# Altium PCB PCB_actionneur2.PcbDoc
Units mil, origin at the board's own origin, x right, y up, seen from the top; angles counter-clockwise.
Board outline 4375 x 2300 mil, 4 copper layers (Top Layer, Internal Plane 1, Internal Plane 2, Bottom Layer); 31 components, 26 nets, 191 pads, 1 vias.
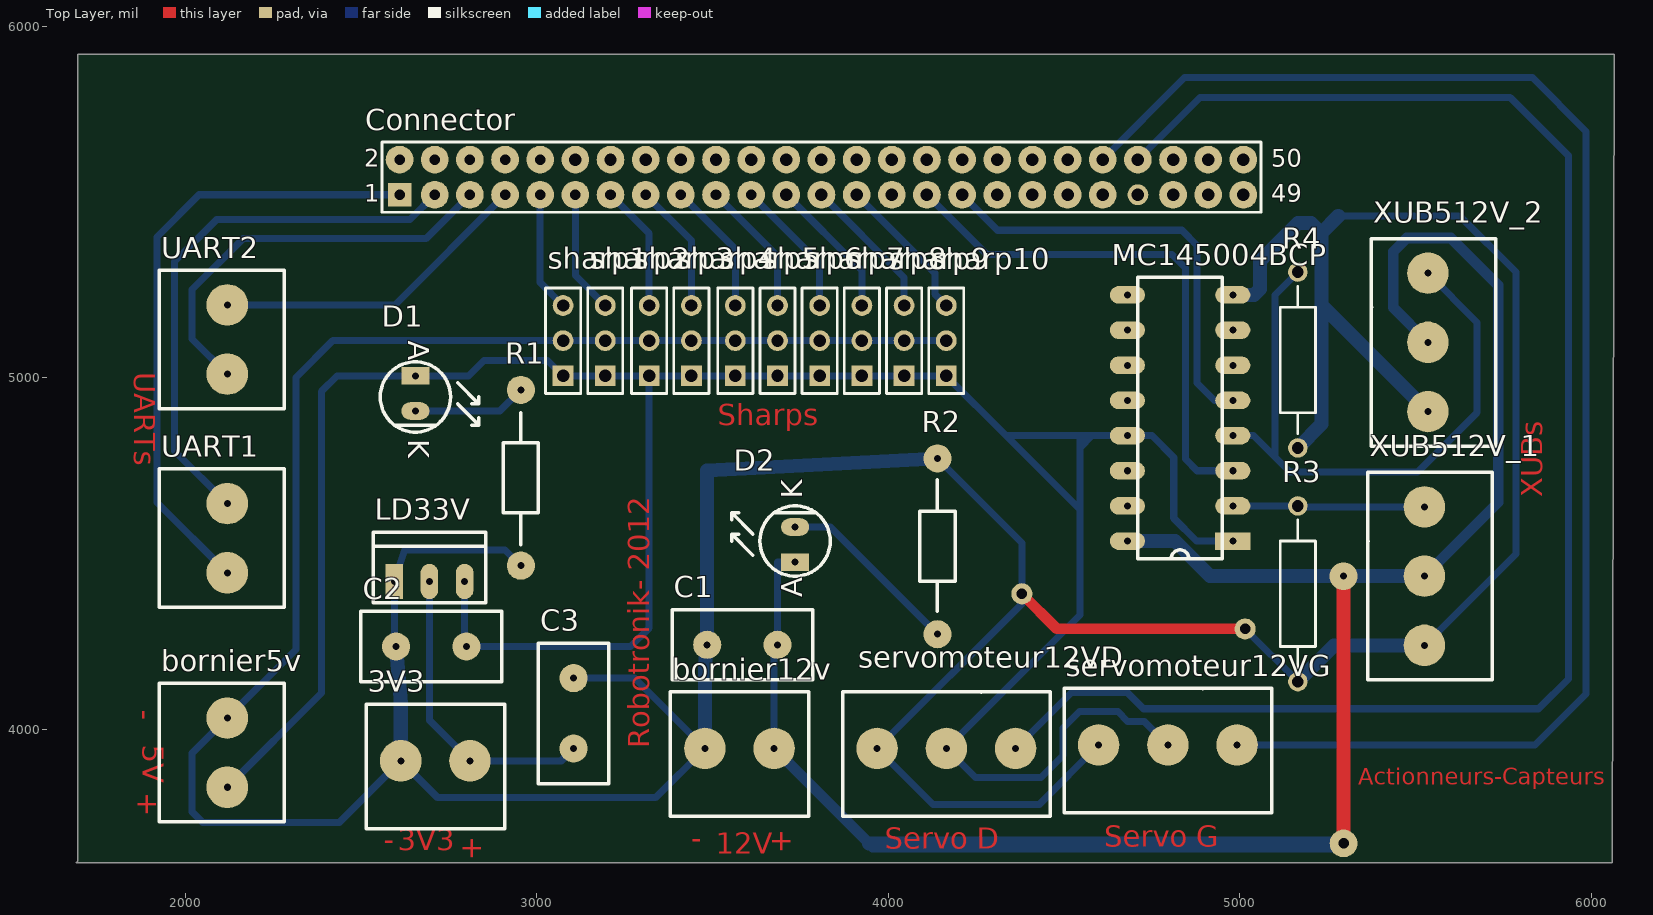
[diagram p0: Top Layer view]
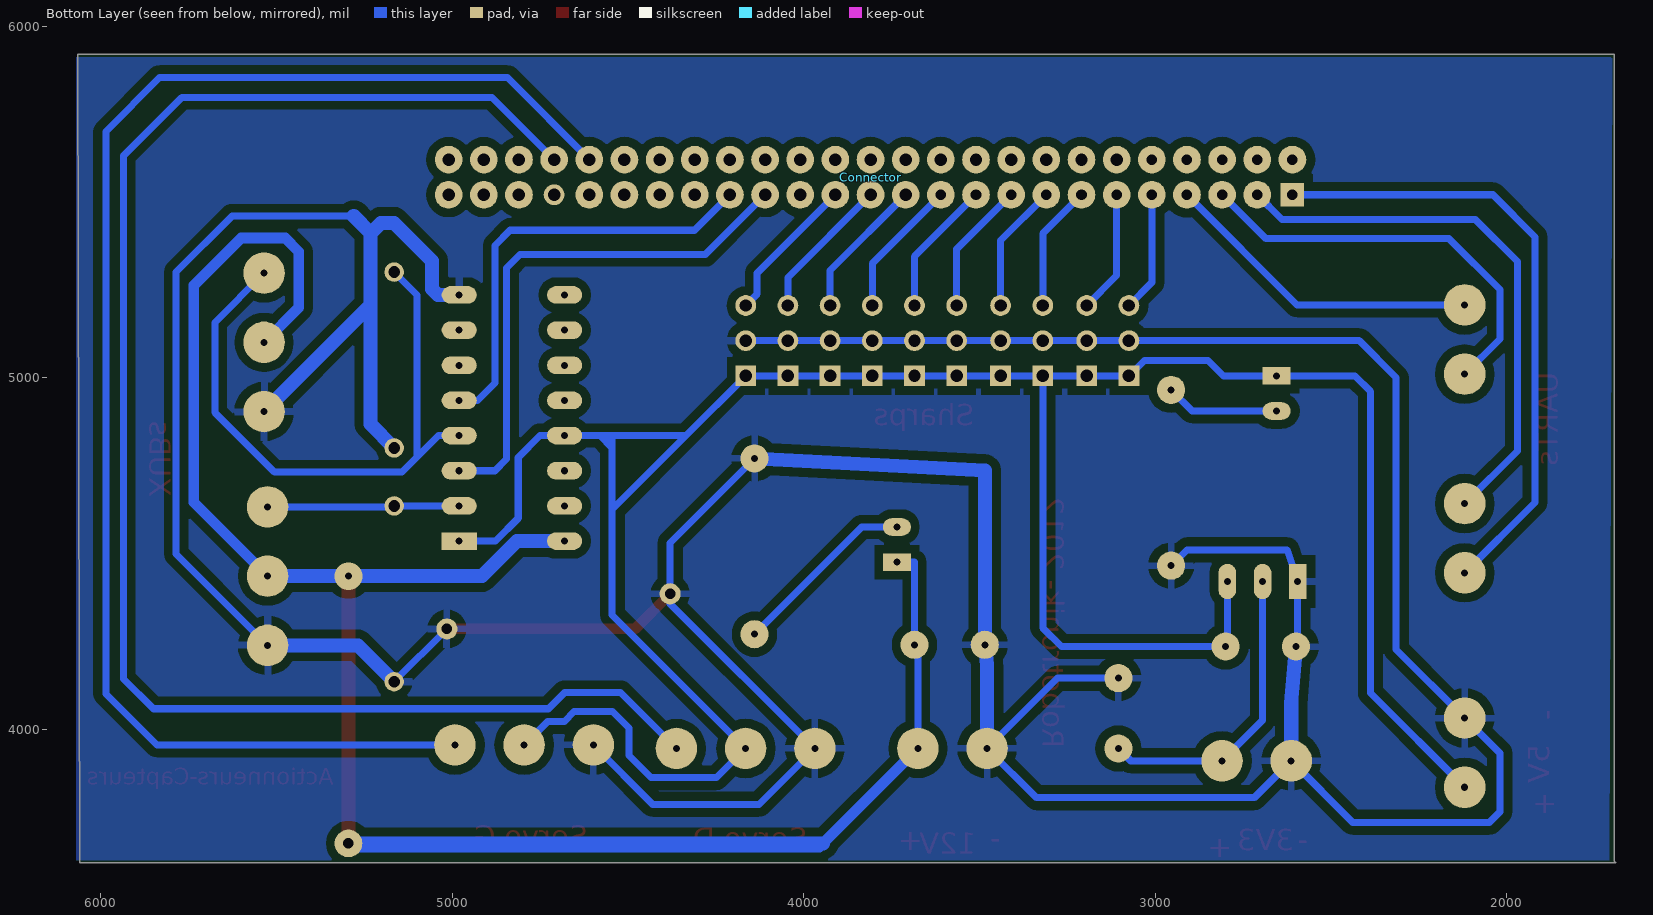
[diagram p1: Bottom Layer view, seen from below]
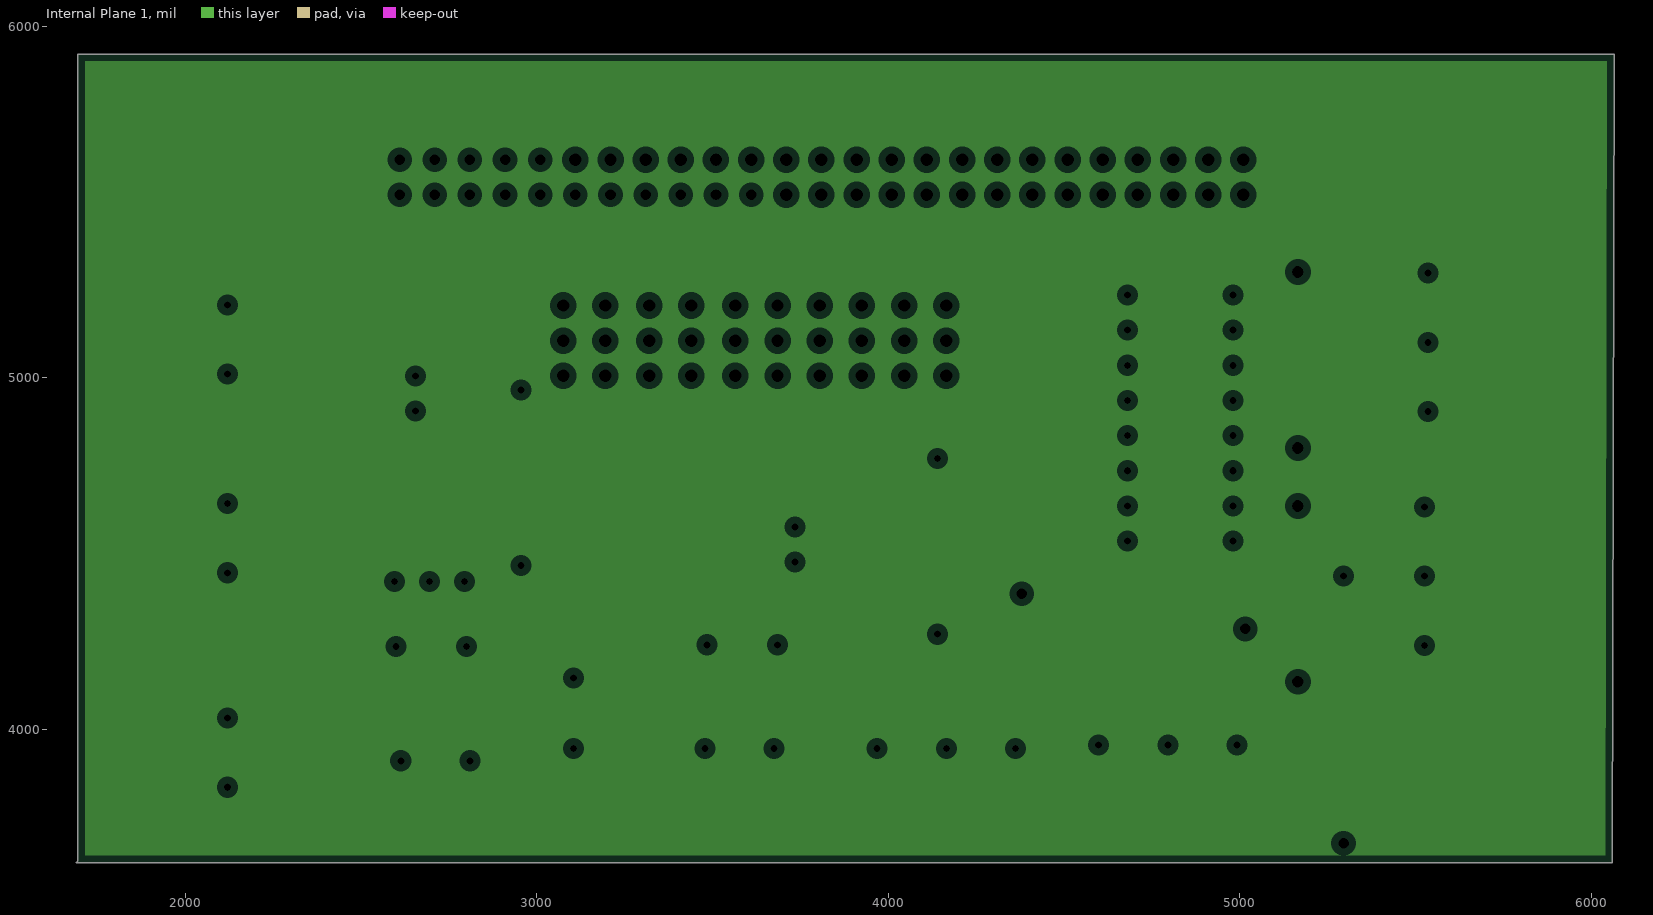
[diagram p2: Internal Plane 1, clearances drawn from the general rule]
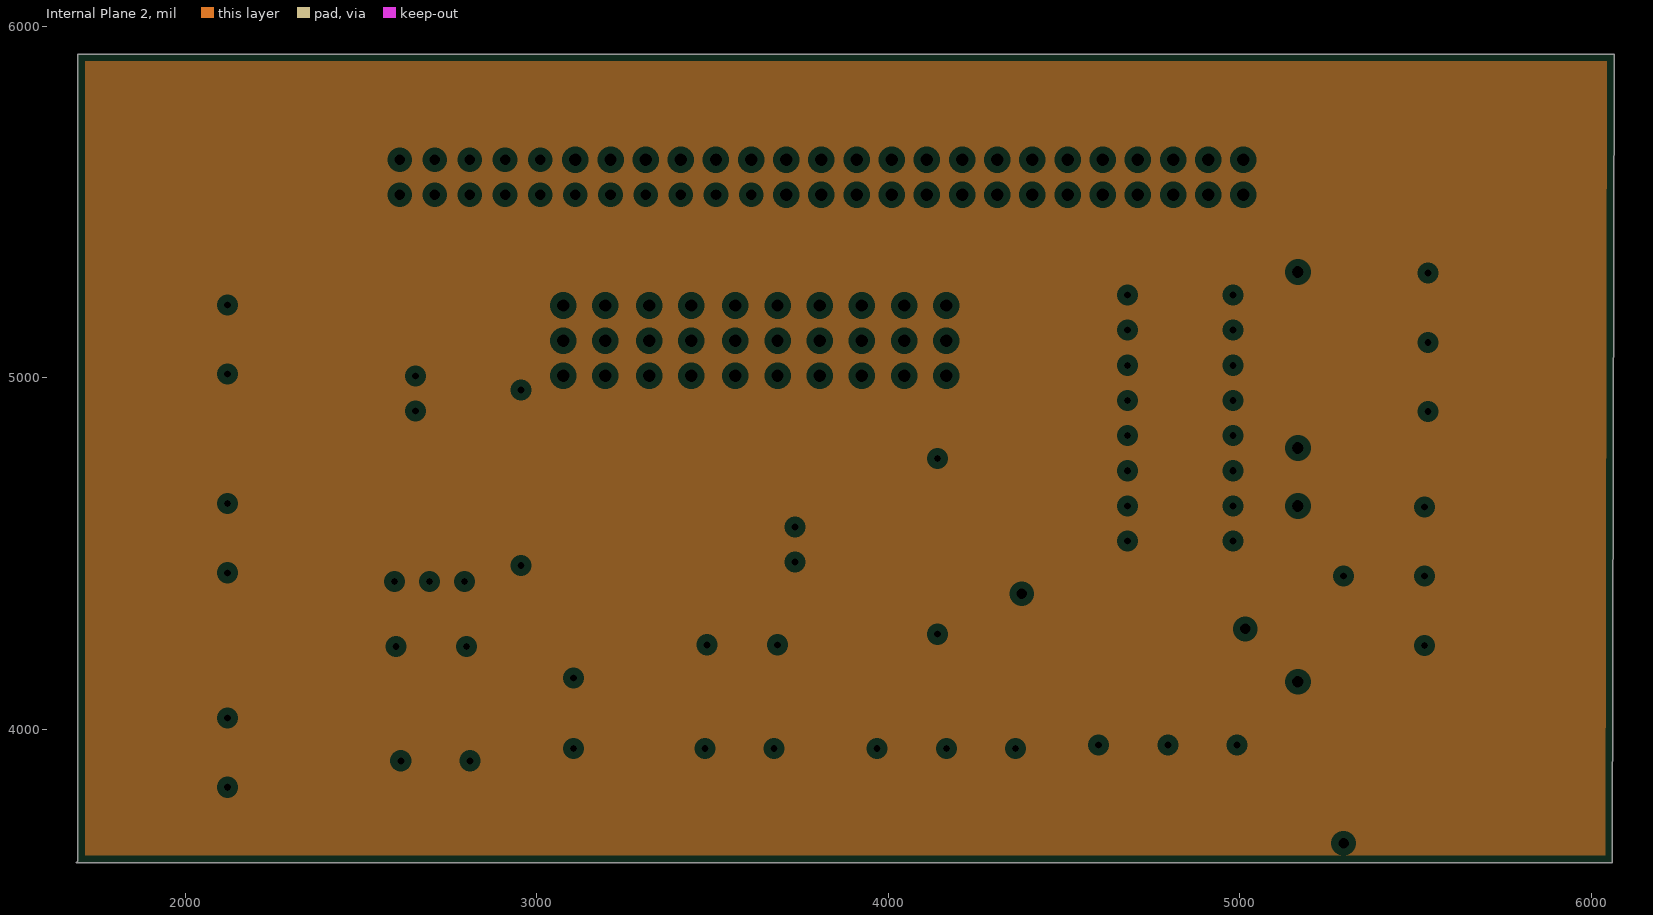
[diagram p3: Internal Plane 2, clearances drawn from the general rule]

## Layer stack, top to bottom
Top Layer: signal copper 1.4
Dielectric: dielectric 12.6, FR-4, Dk 4.8
Internal Plane 1: plane copper 1.4
Dielectric: dielectric 12.6, FR-4, Dk 4.8
Internal Plane 2: plane copper 1.4
Dielectric: dielectric 12.6, FR-4, Dk 4.8
Bottom Layer: signal copper 1.4

## Board outline
6065,5920 1695,5920 1695,3625 1690,3620 6060,3620

## Design rules (kind name [scope] priority, off if disabled: settings)
Clearance [All] p1: gap=13
FabricationTestPointUsage TestPointUsage [All] p1: valid=0 allowmultiple=FALSE
FabricationTestpoint Testpoint [All] p1: side=3 testpointundercomponent=TRUE minsize=40 maxsize=100 preferedsize=60 minholesize=0 maxholesize=40 preferedholesize=32 testpointgrid=1 allowsidetop=TRUE allowsidebottom=TRUE usegrid=TRUE gridtolerance=0.01
PlaneClearance [All] p1: clearance=20
PlaneConnect [All] p1: planeconnectstyle=Relief reliefexpansion=20 reliefentries=4 reliefconductorwidth=10 reliefairgap=10
PolygonConnect [All] p1: connectstyle=Relief reliefconductorwidth=20 reliefentries=4 polygonreliefangle="90 Angle"
RoutingLayers RoutingLayers_1 [All] p1: top layer_v5=FALSE bottom layer_v5=TRUE
RoutingVias [All] p1: holewidth=20 width=78.74 viastyle="Through Hole" minholewidth=20 minwidth=78.74 maxholewidth=20 maxwidth=78.74
SilkscreenOverComponentPads [All] p1: minsilkscreentomaskgap=10
SolderMaskExpansion [All] p1: expansion=4
Width Width_1 [NOT InNetClass('power_net')] p1: maxlimit=20 minlimit=20 preferedwidth=20
Width Width_power [InNetClass('power_net')] p2: maxlimit=50 minlimit=20 preferedwidth=40
22 further rules are at their usual default settings.

## Classes and differential pairs
net class power_net: GND V12
net class com_net: NetConnector_2 NetConnector_4 NetConnector_5 NetConnector_6 NetConnector_8 NetConnector_10 NetConnector_12 NetConnector_14 NetConnector_16 NetConnector_18 NetConnector_20 NetConnector_22 NetConnector_24 NetConnector_26 NetConnector_27 NetConnector_28 NetConnector_29 NetConnector_30 NetConnector_31 NetConnector_32 NetConnector_33 NetConnector_34 NetConnector_35 NetConnector_36 NetConnector_37 NetConnector_38 NetConnector_39 NetConnector_40 NetConnector_42 NetConnector_44 NetConnector_46 NetConnector_48 NetConnector_49 NetConnector_50 RX1 RX2 SERVOD SERVOG SHARP1 SHARP2 SHARP3 SHARP4 SHARP5 SHARP6 SHARP7 SHARP8 SHARP9 SHARP10 TX1 TX2 XUBCMOS_1 XUBCMOS_2

## Components (designator, comment, footprint, x,y, rotation, side; value= is the part's Value field where it differs from the comment)
3V3 "Bornier_2" Bornier_2 2515,3910 r0 top
bornier5v "Bornier_2" Bornier_2 2120,4130 r270 top
bornier12v "Bornier_2" Bornier_2 3380,3945 r0 top
C1 "Cap2" CAPA2 3485,4240 r0 top
C2 "Cap Semi" CAPA2 2600,4235 r0 top
C3 "Cap Semi" CAPA2 3105,4145 r270 top
Connector "Header 25X2" HDR2X25 2610,5520 r0 top
D1 "Led" LED 2655,5005 r270 top
D2 "Led" LED 3735,4475 r90 top
LD33V "LM317T" TO220 2595,4420 r0 top
MC145004BCP "CD4017BCN" DIP16 4980,4535 r180 top
R1 "Res2" res5_1/4W 2955,4465 r90 top
R2 "Res2" res5_1/4W 4140,4770 r270 top
R3 "Res Semi" AXIAL-0.5 5165,4385 r90 top
R4 "Res Semi" AXIAL-0.5 5165,5050 r90 top
servomoteur12VD "Bornier_3" Bornier_3 3870,3945 r0 top
servomoteur12VG "Bornier_3" Bornier_3 4500,3955 r0 top
sharp1 "Bornier_3" HDR1X3 3075,5005 r90 top
sharp2 "Bornier_3" HDR1X3 3195,5005 r90 top
sharp3 "Bornier_3" HDR1X3 3320,5005 r90 top
sharp4 "Bornier_3" HDR1X3 3440,5005 r90 top
sharp5 "Bornier_3" HDR1X3 3565,5005 r90 top
sharp6 "Bornier_3" HDR1X3 3685,5005 r90 top
sharp7 "Bornier_3" HDR1X3 3805,5005 r90 top
sharp8 "Bornier_3" HDR1X3 3925,5005 r90 top
sharp9 "Bornier_3" HDR1X3 4045,5005 r90 top
sharp10 "Bornier_3" HDR1X3 4165,5005 r90 top
UART1 "Bornier_2" Bornier_2 2120,4740 r270 top
UART2 "Bornier_2" Bornier_2 2120,5305 r270 top
XUB512V_1 "Bornier_3" Bornier_3 5525,4140 r90 top
XUB512V_2 "Bornier_3" Bornier_3 5535,4805 r90 top

## Footprints (in the part's own frame and the unit in brackets; to place one, negate y for a bottom-side part, rotate by r counter-clockwise, add the part's x,y. Pads: shape width x height; smd on the part's side, far side on the other; paste and mask are expansions set on the pad)
AXIAL-0.5 [mm] "Axial Device, Thru-Hole; 2 Leads; 0.5 in Pin Spacing"
  round 1.4 hole 0.85: 1(-6.35,0) 2(6.35,0)
  silkscreen extent -5.33,-1.27 5.33,1.27
Bornier_2 [mm]
  round 3 hole 0.508: 1(2.5,0) 2(7.5,0)
  silkscreen extent 0,-4.9 10,4.1
Bornier_3 [mm]
  round 3 hole 0.508: 1(2.5,0) 2(7.5,0) 3(12.5,0)
  silkscreen extent 0,-4.9 15,4.1
CAPA2 [mil]
  round 80 hole 20: 1(0,0) 2(200,0)
  silkscreen extent -100,-100 300,100
DIP16 [mil]
  rect 100x50 hole 20: 1(0,0)
  oval 100x50 hole 20: 2(0,-100) 3(0,-200) 4(0,-300) 5(0,-400) 6(0,-500) 7(0,-600) 8(0,-700) 9(300,-700) 10(300,-600) 11(300,-500) 12(300,-400) 13(300,-300) 14(300,-200) 15(300,-100) 16(300,0)
  silkscreen extent 30,-750 270,50
HDR1X3 [mm] "Connector; Header; 3 Position"
  rect 1.5x1.5 hole 0.9: 1(0,0)
  round 1.5 hole 0.9: 2(2.54,0) 3(5.08,0)
  silkscreen extent -1.27,-1.27 6.35,1.27
HDR2X25 [mm] "Connector; Header; 25x2 Position"
  rect 1.5x1.5 smd far side: 1(0,0)
  round 1.5 smd far side: 2(0,2.54) 3(2.54,0) 4(2.54,2.54) 5(5.08,0) 6(5.08,2.54) 7(7.62,0) 8(7.62,2.54) 9(10.16,0) 10(10.16,2.54) 11(12.7,0) 13(15.24,0) 15(17.78,0) 17(20.32,0) 19(22.86,0) 21(25.4,0)
  round 1.5 hole 0.9: 12(12.7,2.54) 14(15.24,2.54) 16(17.78,2.54) 18(20.32,2.54) 20(22.86,2.54) 22(25.4,2.54) 23(27.94,0) 24(27.94,2.54) 25(30.48,0) 26(30.48,2.54) 27(33.02,0) 28(33.02,2.54) 29(35.56,0) 30(35.56,2.54) 31(38.1,0) 32(38.1,2.54) 33(40.64,0) 34(40.64,2.54) 35(43.18,0) 36(43.18,2.54) 37(45.72,0) 38(45.72,2.54) 39(48.26,0) 40(48.26,2.54) 41(50.8,0) 42(50.8,2.54) 43(53.34,0) 44(53.34,2.54) 45(55.88,0) 46(55.88,2.54) 47(58.42,0) 48(58.42,2.54) 49(60.96,0) 50(60.96,2.54)
  silkscreen extent -1.27,-1.27 62.23,3.81
LED [mil]
  rect 50x80 hole 20: 1(0,0)
  oval 50x80 hole 20: 2(100,0)
  silkscreen extent -40,-100 160,180
res5_1/4W [mil]
  round 80 hole 20: 1(0,0) 2(500,0)
  silkscreen extent 60,-50 435,50
TO220 [mil]
  rect 50x100 hole 20: 1(0,0)
  oval 50x100 hole 20: 2(100,0) 3(200,0)
  silkscreen extent -60,-60 260,140

## Part data
3V3 bornier5v bornier12v UART1 UART2: "Header, 2-Pin"
C1: "Capacitor"
C2 C3: "Capacitor (Semiconductor SIM Model)"
Connector: "Header, 25-Pin, Dual row"
D1 D2: "LED"
LD33V: "3-Terminal Adjustable Regulator"
MC145004BCP: "Decade Counter/Divider with 10 Decoded Outputs"
R1 R2: "Resistor"
R3 R4: "Semiconductor Resistor"
servomoteur12VD servomoteur12VG sharp1 sharp2 sharp3 sharp4 sharp5 sharp6 sharp7 sharp8 sharp9 sharp10 XUB512V_1 XUB512V_2: "Header, 3-Pin"

## Free pads (board coordinates)
  rect 66.93x66.93 hole 30: 0(2610,5520)
  round 78.74 hole 30: 0(2610,5620) 0(2710,5520) 0(2710,5620) 0(2810,5520) 0(2810,5620) 0(2910,5520) 0(2910,5620) 0(3010,5520) 0(3010,5620) 0(3110,5520) 0(3110,5620) 0(3210,5520) 0(3210,5620) 0(3310,5520) 0(3310,5620) 0(3410,5520) 0(3410,5620) 0(3510,5520) 0(3510,5620) 0(3610,5520) 0(3610,5620) 0(3710,5520) 0(3710,5620) 0(3810,5520) 0(3810,5620) 0(3910,5520) 0(3910,5620) 0(4010,5520) 0(4010,5620) 0(4110,5520) 0(4110,5620) 0(4210,5520) 0(4210,5620) 0(4310,5520) 0(4310,5620) 0(4410,5520) 0(4410,5620) 0(4510,5520) 0(4510,5620) 0(4610,5520) 0(4610,5620) 0(4710,5620) 0(4810,5520) 0(4810,5620) 0(4910,5520) 0(4910,5620) 0(5010,5520) 0(5010,5620) 2(5295,3675)
  round 60 hole 30: 0(5015,4285) 1(4380,4385)

## Via types
v1: diameter 78.74, hole 20, Top Layer to Bottom Layer, 1 vias

## Nets (pads, with @x,y where several pads share a name; then routed paths per layer and width w, separated by ;. In a path a pad name is that pad's centre, name@x,y a point inside that pad or via, vN(x,y) a via of type N, cw(c..) or ccw(c..) an arc to the next point about the centre after c; other vN are vias at no path point)
3V3: 3V3.2 C3.2 LD33V.2 | length 867
  Bottom Layer w20: LD33V.2 2695,4025.28 3V3.2 3070,3910 C3.2
GND: 3V3.1 bornier5v.1 bornier12v.1 C1.1 C2.1 C3.1 LD33V.1 MC145004BCP.8 pad.0@5015,4285 pad.1 R1.1 R2.1 R3.1 R4.1 servomoteur12VD.1 servomoteur12VG.1 sharp1.2 sharp2.2 sharp3.2 sharp4.2 sharp5.2 sharp6.2 sharp7.2 sharp8.2 sharp9.2 sharp10.2 XUB512V_1.1 XUB512V_2.1 | length 14181.3
  Top Layer w30: pad.1 4480,4285 pad.0@5015,4285
  Bottom Layer w20: C2.1 2595,4235 LD33V.1 2625,4510 2910,4510 R1.1 ; C3.1 3278.43,4145 bornier12v.1 3338.43,3805 2718.43,3805 3V3.1 2438.43,3735 2050,3735 2020,3765 2020,3931.57 bornier5v.1 2315,4226.57 2315,5000 2420,5105 sharp1.2 sharp2.2 sharp3.2 sharp4.2 sharp5.2 sharp6.2 sharp7.2 sharp8.2 sharp9.2 sharp10.2 ; R2.1 4380,4530 pad.1 4380,4356.57 servomoteur12VD.1 4127.43,3786 4429.43,3786 servomoteur12VG.1 ; pad.0@5015,4285 R3.1 ; 5280,5459 5626,5459 5785,5300 5785,4498.43 XUB512V_1.1
  Bottom Layer w40: C2.1 2613.43,4073 3V3.1 ; bornier12v.1 3478.43,4183.85 C1.1 3485,4736 R2.1 ; MC145004BCP.8 5040,5235 5057,5252 5057,5332 5165,5440 5203,5440 5232.56,5410.44 ; R3.1 5268.43,4238.43 XUB512V_1.1 ; R4.1 5232.56,4867.56 5232.56,4903.43 5232.56,5205.87 ; 5280,5459 5232.56,5411.56 5232.56,5410.44 ; XUB512V_2.1 5232.56,5205.87 ; 5232.56,5205.87 5232.56,5410.44
NetD1_2: D1.2 R1.2 | length 324.9
  Bottom Layer w20: D1.2 2895,4905 R1.2
NetD2_2: D2.2 R2.2 | length 531.3
  Bottom Layer w20: D2.2 3835,4575 R2.2
RX1: Connector.1 pad.0@2610,5520 UART1.2 | length 1777.8
  Bottom Layer w20: UART1.2 1920,4644.72 1920,5400 2040,5520 Connector.1
RX2: Connector.5 pad.0@2810,5520 UART2.2 | length 1183.5
  Bottom Layer w20: UART2.2 2020,5109.72 2020,5250 2165,5395 2685,5395 Connector.5
SERVOD: Connector.44 pad.0@4710,5620 servomoteur12VD.3 | length 4548.1
  Bottom Layer w20: servomoteur12VD.3 4521.18,4104.06 4679.78,4104.06 4725.84,4058 5850,4058 5935,4143 5935,5631 5769,5797 4887,5797 Connector.44
SERVOG: Connector.42 pad.0@4610,5620 servomoteur12VG.3 | length 4187.8
  Bottom Layer w20: Connector.42 4843,5853 5832,5853 5985,5700 5985,4100 5840,3955 servomoteur12VG.3
SHARP1: Connector.9 pad.0@3010,5520 sharp1.3 | length 341.9
  Bottom Layer w20: Connector.9 3010,5270 sharp1.3
SHARP2: Connector.11 pad.0@3110,5520 sharp2.3 | length 350.2
  Bottom Layer w20: Connector.11 3110,5290 sharp2.3
SHARP3: Connector.13 pad.0@3210,5520 sharp3.3 | length 360.6
  Bottom Layer w20: Connector.13 3320,5410 sharp3.3
SHARP4: Connector.15 pad.0@3310,5520 sharp4.3 | length 368.8
  Bottom Layer w20: Connector.15 3440,5390 sharp4.3
SHARP5: Connector.17 pad.0@3410,5520 sharp5.3 | length 379.2
  Bottom Layer w20: Connector.17 3565,5365 sharp5.3
SHARP6: Connector.19 pad.0@3510,5520 sharp6.3 | length 387.5
  Bottom Layer w20: Connector.19 3685,5345 sharp6.3
SHARP7: Connector.21 pad.0@3610,5520 sharp7.3 | length 395.8
  Bottom Layer w20: Connector.21 3805,5325 sharp7.3
SHARP8: Connector.23 pad.0@3710,5520 sharp8.3 | length 404.1
  Bottom Layer w20: Connector.23 3925,5305 sharp8.3
SHARP9: Connector.25 pad.0@3810,5520 sharp9.3 | length 412.3
  Bottom Layer w20: Connector.25 4045,5285 sharp9.3
SHARP10: Connector.27 pad.0@3910,5520 sharp10.3 | length 420.6
  Bottom Layer w20: Connector.27 4132.3,5297.7 4132.3,5237.7 sharp10.3
TX1: Connector.3 pad.0@2710,5520 UART1.1 | length 1569.3
  Bottom Layer w20: UART1.1 1970,4791.57 1970,5330 2090,5450 2640,5450 Connector.3
TX2: Connector.7 pad.0@2910,5520 UART2.1 | length 919.8
  Bottom Layer w20: UART2.1 2596.57,5206.57 Connector.7
V5: bornier5v.2 C2.2 D1.1 LD33V.3 MC145004BCP.1 MC145004BCP.13 servomoteur12VD.2 servomoteur12VG.2 sharp1.1 sharp2.1 sharp3.1 sharp4.1 sharp5.1 sharp6.1 sharp7.1 sharp8.1 sharp9.1 sharp10.1 | length 7840
  Bottom Layer w20: bornier5v.2 2388,4102.72 2388,4961 2432,5005 D1.1 2806,5005 2850,5049 3031,5049 sharp1.1 sharp2.1 sharp3.1 ; C2.2@2795,4240 LD33V.3 ; C2.2 3267,4235 3320,4288 sharp3.1 ; servomoteur12VG.2 4728.28,4022 4681,4022 4653,4050 4544,4050 4497,4003 4497,3925 4434,3862 4248.28,3862 servomoteur12VD.2 4545,4324.72 4545,4625 ; MC145004BCP.1 4877,4535 4812,4600 4812,4773 4750,4835 MC145004BCP.13 4580,4835 ; sharp3.1 sharp4.1 sharp5.1 sharp6.1 sharp7.1 sharp8.1 sharp9.1 sharp10.1 4335,4835 ; 4335,4835 4545,4625 ; 4335,4835 4545,4835 ; 4545,4625 4545,4800 ; 4545,4800 4580,4835 ; 4545,4800 4545,4835 ; 4545,4835 4580,4835
V12: bornier12v.2 C1.2 D2.1 MC145004BCP.16 pad.2 XUB512V_1.2 XUB512V_2.2 | length 6911
  Top Layer w40: pad.2 v1(5295,4435.28)
  Bottom Layer w20: bornier12v.2 3675.28,4230.28 C1.2 3685,4475 D2.1
  Bottom Layer w30: bornier12v.2 3945.28,3675 3956.28,3664 pad.2@5306,3664 ; XUB512V_1.2 5735,4645.28 5735,5262 5600,5397 5475,5397 5435.94,5357.94 5435.94,5199.33 XUB512V_2.2
  Bottom Layer w40: 3945.28,3675 pad.2 ; MC145004BCP.16 4816,4535 4915.72,4435.28 v1(5295,4435.28) XUB512V_1.2
XUBCMOS_1: Connector.31 MC145004BCP.3 pad.0@4110,5520 | length 1513.8
  Bottom Layer w20: Connector.31 4280,5350 4807,5350 4845,5312 4845,4768 4878,4735 MC145004BCP.3
XUBCMOS_2: Connector.33 MC145004BCP.5 pad.0@4210,5520 | length 1241.4
  Bottom Layer w20: Connector.33 4311,5419 4835,5419 4878,5376 4878,4985 4928,4935 MC145004BCP.5
XUBTTL_1: MC145004BCP.2 R3.2 XUB512V_1.3 | length 548.1
  Bottom Layer w20: MC145004BCP.2 R3.2 5165,4632 5524.87,4632 XUB512V_1.3
XUBTTL_2: MC145004BCP.4 R4.2 XUB512V_2.3 | length 1816.1
  Bottom Layer w20: MC145004BCP.4 5039,4835 5100,4774 ; R4.2 5100,5235 5100,4774 ; XUB512V_2.3 5675,5157.13 5675,4900 5506,4731 5143,4731 5100,4774
pads on no net: Connector.2 Connector.4 Connector.6 Connector.8 Connector.10 Connector.12 Connector.14 Connector.16 Connector.18 Connector.20 Connector.22 Connector.24 Connector.26 Connector.28 Connector.29 Connector.30 Connector.32 Connector.34 Connector.35 Connector.36 Connector.37 Connector.38 Connector.39 Connector.40 Connector.41 Connector.43 Connector.45 Connector.46 Connector.47 Connector.48 Connector.49 Connector.50 MC145004BCP.6 MC145004BCP.7 MC145004BCP.9 MC145004BCP.10 MC145004BCP.11 MC145004BCP.12 MC145004BCP.14 MC145004BCP.15

## Polygon pours and split planes (outlines as drawn)
GND on Bottom Layer "Plan de masse" (solid, remove dead copper, pour order 5): 1700.82,5911.19 6069.6,5911.19 6069.59,5911.18 6069.59,3626.74 1709.15,3626.74
no net on Internal Plane 1 (split plane): 6039.95,3640.1 1715.1,3640.1 1715.1,5899.9 6044.86,5899.9
no net on Internal Plane 2 (split plane): 6039.95,3640.1 1715.1,3640.1 1715.1,5899.9 6044.86,5899.9

## Other copper
Top Layer:
  text "UARTs" at 1855,5015 h60 r270
  text "Sharps" at 3515,4865 h60
  text "XUBs" at 5860,4660 h60 r90
  text "-" at 1905,4025 h60 r90
  text "5V" at 1880,3955 h60 r270
  text "Robotronik- 2012" at 3320,3945 h60 r90
  text "Actionneurs-Capteurs" at 5336.17,3825.76 h80
  text "+" at 1864.95,3819.98 h60 r270
  text "+" at 3669.95,3714.98 h60 r270
  text "+" at 2789.95,3694.98 h60 r270
  text "Servo G" at 4615,3665 h60
  text "-" at 3440,3660 h60
  text "Servo D" at 3990,3660 h60
  text "-" at 2565,3655 h60
  text "3V3" at 2605,3655 h60
  text "12V" at 3510,3645 h60

## Silkscreen, mask and mechanical layers (free items; w line width, h text height)
Drill Drawing:
  text ".LEGEND" at 6137.01,3220 h60
  text "Drill Drawing." at 6137.01,3100 h60

## Text inside footprints (layer, text, board x,y; h text height)
Connector: Top Overlay "50" at 5090,5600 h50; Top Overlay "49" at 5090,5500 h50; Top Overlay "1" at 2510,5500 h50; Top Overlay "2" at 2510,5600 h50
D1: Top Overlay "A" at 2635,5105 h60 r270; Top Overlay "K" at 2635,4825 h60 r270
D2: Top Overlay "A" at 3755,4375 h60 r90; Top Overlay "K" at 3755,4655 h60 r90